# EAGLE board Carte_Mere_V3 (EAGLE 9.5.2)
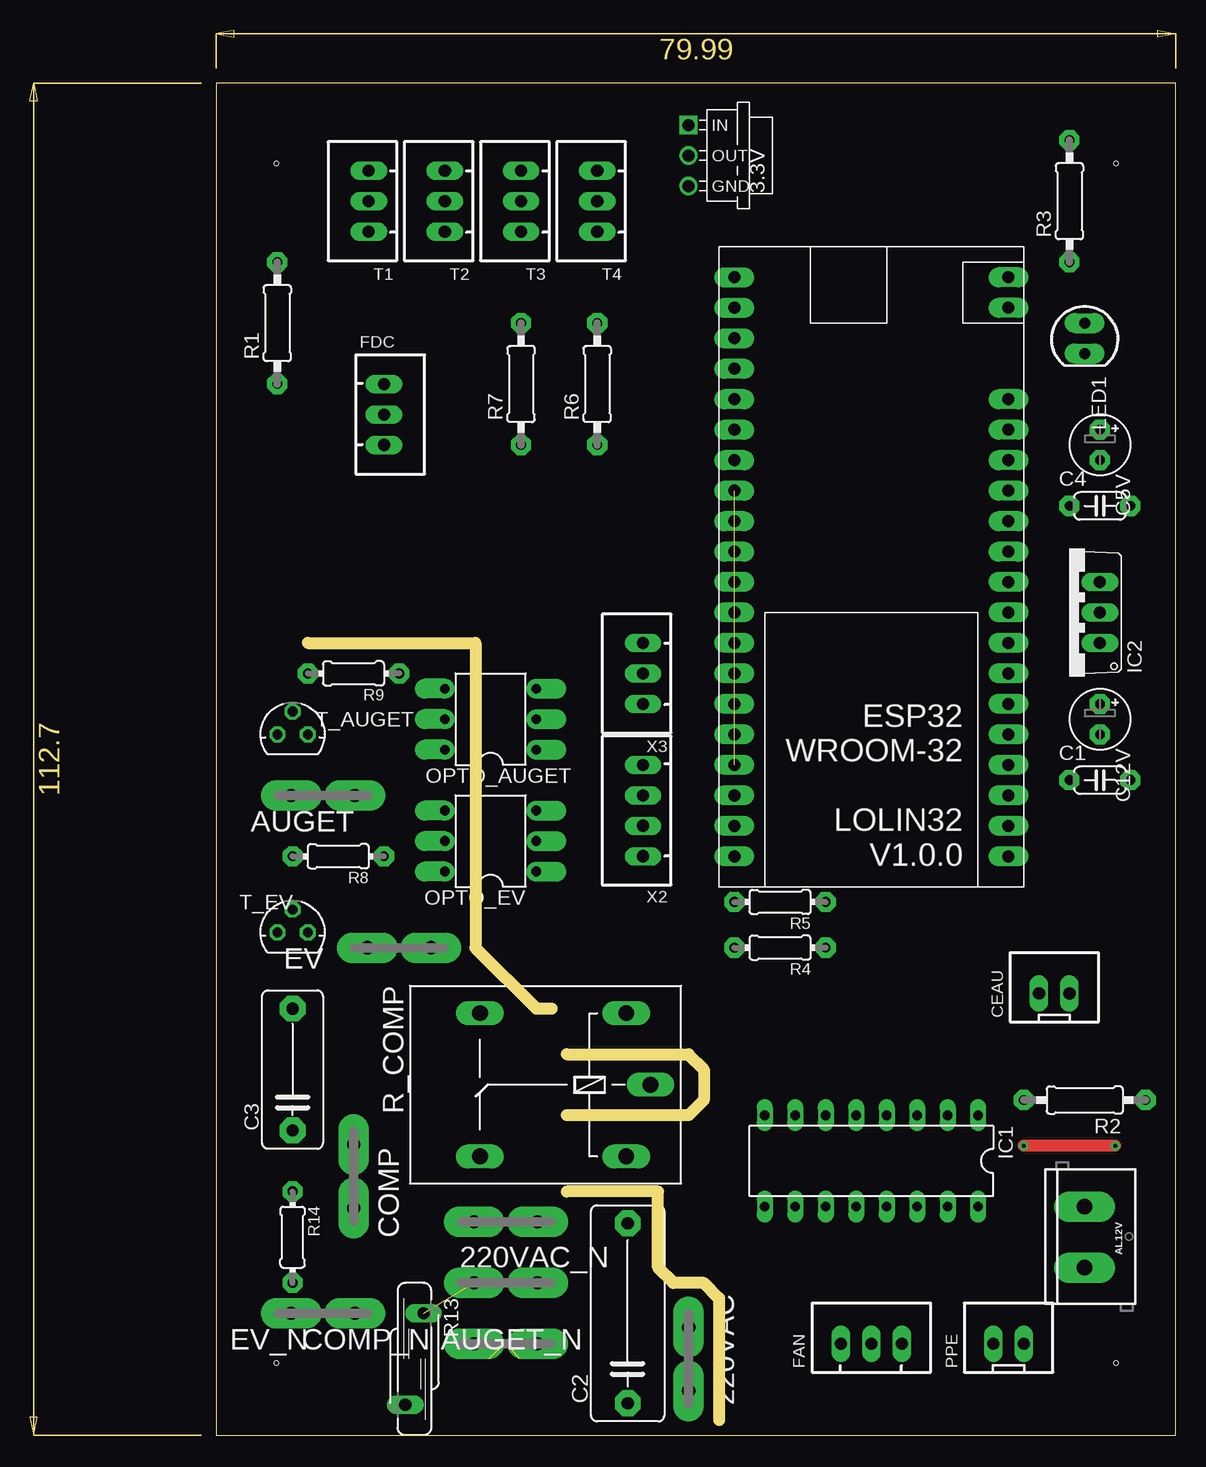
[diagram p0: board, top side]
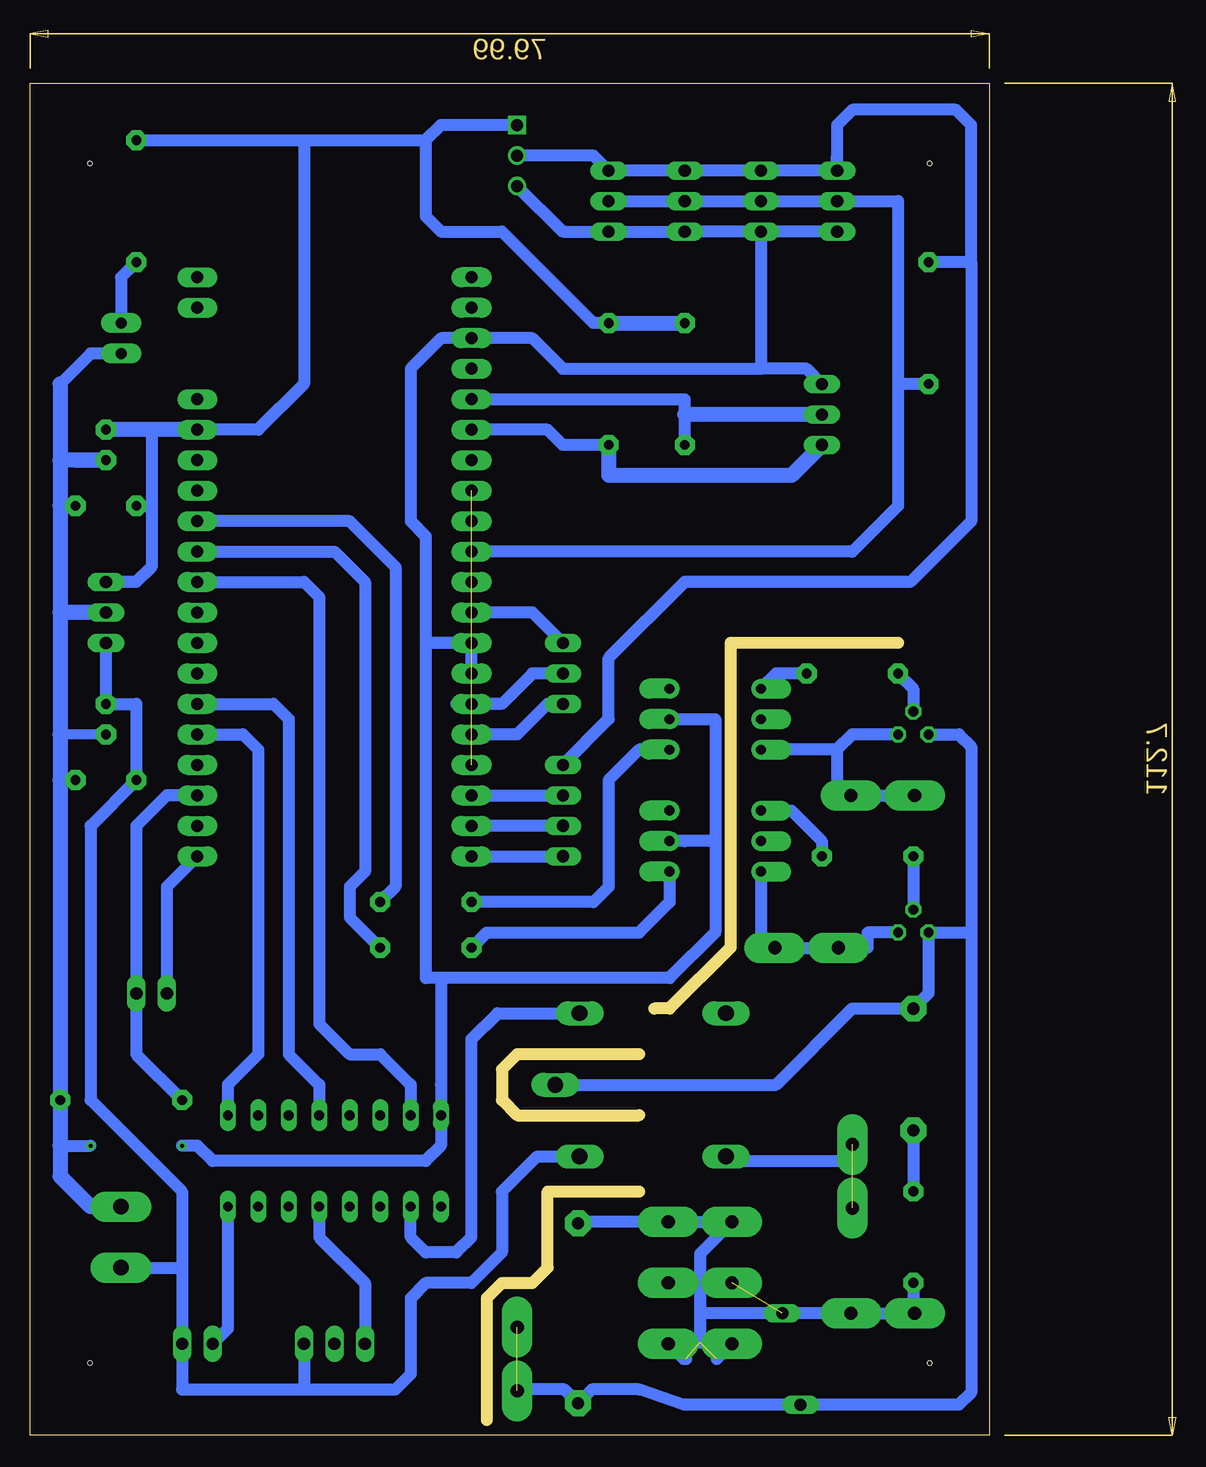
[diagram p1: board, bottom side, seen from below]

Size 79.99 x 112.7 mm. Coordinates in mm from the lower left corner, seen from the top.
Outline: 29.21,31.75 39.37,31.75 40.64,30.48 40.64,27.94 39.37,26.67 29.21,26.67
Outline: 41.91,1.27 41.91,11.43 40.64,12.7 38.1,12.7 36.83,13.97 36.83,20.32 29.21,20.32
Outline: 7.62,66.04 21.59,66.04 21.59,40.64 26.67,35.56 27.94,35.56
Outline: 0,0 79.99,0 79.99,112.7 0,112.7 0,0
Copper layers (1*16): Top 0.035mm / dielectric 1.5mm / Bottom 0.035mm
Design rules "default": minimum track width 6mil, minimum drill 0.35mm, track to track 6mil, track to pad 6mil, pad to pad 6mil, via to via 6mil, smd to smd 6mil, copper to edge 40mil, drill to drill 6mil, minimum pad ring 10mil, minimum via ring 8mil, stop-mask expansion 4mil, vias tented up to drill 0mil, thermal gap 10mil
Holes 0.35 mm at 5,6 75,6 5,106 75,106

## Footprints (pad centres in the part's own frame; a part is rotated, then mirrored left to right if it is on the bottom)
REG-AMS1117-3P#V = drill 1 square: 1 -2.54,-5.08 | drill 1: 2 0,-5.08; 3 2.54,-5.08
F061.040 = drill 1.1 pad 2.54 long: A1 -2.65,0; A2 2.65,0
BORNIER_A_VIS_2_5.12MM = drill 1.3 pad 2.54 long: 1 -2.54,0; 2 2.54,0
C050-024X044 = drill 0.813 pad 1.676 octagon: 1 -2.54,0; 2 2.54,0
C15B6 = drill 1.016 pad 2.159 octagon: 1 -7.493,0; 2 7.493,0
C10B5 = drill 1.016 pad 2.159 octagon: 1 -5.08,0; 2 5.08,0
E2,5-5 = drill 0.813 pad 1.676 octagon: V+ -1.27,0; V- 1.27,0
JST-XH-02-PACKAGE-LONG-PAD = drill 1.016 long: 1 -1.27,0; 2 1.27,0
JST-XH-03-PACKAGE-LONG-PAD = drill 1.016 long: 1 -2.54,0; 2 0,0; 3 2.54,0
DIL16 = drill 0.813 long: 1 -8.89,-3.81; 2 -6.35,-3.81; 3 -3.81,-3.81; 4 -1.27,-3.81; 5 1.27,-3.81; 6 3.81,-3.81; 7 6.35,-3.81; 8 8.89,-3.81; 9 8.89,3.81; 10 6.35,3.81; 11 3.81,3.81; 12 1.27,3.81; 13 -1.27,3.81; 14 -3.81,3.81; 15 -6.35,3.81; 16 -8.89,3.81
TO220V = drill 1.016 long: 1 -2.54,-2.54; 2 0,-2.54; 3 2.54,-2.54
LED5MM = drill 0.9 pad 1.676 long: A -1.27,0; K 1.27,0
DIL06 = drill 0.813 pad 1.676 offset: 1 -2.54,-3.81; 2 0,-3.81; 3 2.54,-3.81; 4 2.54,3.81; 5 0,3.81; 6 -2.54,3.81
0207/10 = drill 0.813 pad 1.676 octagon: 1 -5.08,0; 2 5.08,0
0204/7 = drill 0.813 pad 1.676 octagon: 1 -3.81,0; 2 3.81,0
S10K11 = drill 1.016 long: 1 -0.762,-3.81; 2 0.762,3.81
G5LE = drill 1.321 long: 1 -7.493,-5.969; 2 -7.493,5.969; O 4.699,5.969; P -9.525,0; S 4.699,-5.969
TO92-6 = drill 0.813 octagon: A1 -1.27,0; A2 1.27,0; G 0,1.905
ESP32_LOLIN_V1.0.0 = drill 1 pad 1.676 long: 1 -11.43,24.13; 2 -11.43,21.59; 3 -11.43,19.05; 4 -11.43,16.51; 5 -11.43,13.97; 6 -11.43,11.43; 7 -11.43,8.89; 8 -11.43,6.35; 9 -11.43,3.81; 10 -11.43,1.27; 11 -11.43,-1.27; 12 -11.43,-3.81; 13 -11.43,-6.35; 14 -11.43,-8.89; 15 -11.43,-11.43; 16 -11.43,-13.97; 17 11.43,24.13; 18 11.43,21.59; 19 11.43,19.05; 20 11.43,16.51; 21 11.43,13.97; 22 11.43,11.43; 23 11.43,8.89; 24 11.43,6.35; 25 11.43,3.81; 26 11.43,1.27; 27 11.43,-1.27; 28 11.43,-3.81; 29 11.43,-6.35; 30 11.43,-8.89; 31 11.43,-11.43; 32 11.43,-13.97; 33 11.43,-16.51; 34 11.43,-19.05; 35 11.43,-21.59; 36 11.43,-24.13; + -11.43,-21.59; - -11.43,-24.13
JST-XH-04-PACKAGE-LONG-PAD = drill 1.016 long: 1 -3.81,0; 2 -1.27,0; 3 1.27,0; 4 3.81,0

## Placement (x,y rotation side)
3.3V  REG-AMS1117-3P-3.3V#V  [REG-AMS1117-3P#V]  44.45,106.68 270 top
220VAC  PIN2F061.040  [F061.040]  39.37,6.35 90 top
220VAC_N  PIN2F061.040  [F061.040]  24.13,17.78 0 top
AL12V  [BORNIER_A_VIS_2_5.12MM]  72.39,16.51 270 top
AUGET  PIN2F061.040  [F061.040]  8.89,53.34 180 top
AUGET_N  PIN2F061.040  [F061.040]  24.13,12.7 180 top
C1  100nF  [C050-024X044]  73.66,54.61 0 top
C2  0.1µF  [C15B6]  34.29,10.16 90 top
C3  47nF  [C10B5]  6.35,30.48 90 top
C4  100nF  [C050-024X044]  73.66,77.47 0 top
C5V  47µF  [E2,5-5]  73.66,82.55 270 top
C12V  47µF  [E2,5-5]  73.66,59.69 270 top
CEAU  JST-XH-02-PIN-LONG-PAD  [JST-XH-02-PACKAGE-LONG-PAD]  69.85,36.83 0 top
COMP  PIN2F061.040  [F061.040]  11.43,21.59 90 top
COMP_N  PIN2F061.040  [F061.040]  24.13,7.62 180 top
EV  PIN2F061.040  [F061.040]  15.24,40.64 180 top
EV_N  PIN2F061.040  [F061.040]  8.89,10.16 180 top
FAN  JST-XH-03-PIN-LONG-PAD  [JST-XH-03-PACKAGE-LONG-PAD]  54.61,7.62 0 top
FDC  JST-XH-03-PIN-LONG-PAD  [JST-XH-03-PACKAGE-LONG-PAD]  13.97,85.09 270 top
IC1  ULN2003AN  [DIL16]  54.61,22.86 180 top
IC2  7805TV  [TO220V]  71.12,68.58 90 top
LED1  [LED5MM]  72.39,91.44 270 top
OPTO_AUGET  MOC3041M  [DIL06]  22.86,59.69 90 top
OPTO_EV  MOC3041M  [DIL06]  22.86,49.53 90 top
PPE  JST-XH-02-PIN-LONG-PAD  [JST-XH-02-PACKAGE-LONG-PAD]  66.04,7.62 0 top
R1  4.7K  [0207/10]  5.08,92.71 90 top
R2  10K  [0207/10]  72.39,27.94 180 top
R3  330R  [0207/10]  71.12,102.87 90 top
R4  330R  [0204/7]  46.99,40.64 180 top
R5  330R  [0204/7]  46.99,44.45 180 top
R6  4.7K  [0207/10]  31.75,87.63 90 top
R7  4.7K  [0207/10]  25.4,87.63 90 top
R8  220R  [0204/7]  10.16,48.26 180 top
R9  220R  [0204/7]  11.43,63.5 180 top
R13  S10K11  [S10K11]  16.51,6.35 180 top
R14  220R  [0204/7]  6.35,16.51 270 top
R_COMP  G5L  [G5LE]  26.67,29.21 180 top
T1  JST-XH-03-PIN-LONG-PAD  [JST-XH-03-PACKAGE-LONG-PAD]  12.7,102.87 90 top
T2  JST-XH-03-PIN-LONG-PAD  [JST-XH-03-PACKAGE-LONG-PAD]  19.05,102.87 90 top
T3  JST-XH-03-PIN-LONG-PAD  [JST-XH-03-PACKAGE-LONG-PAD]  25.4,102.87 90 top
T4  JST-XH-03-PIN-LONG-PAD  [JST-XH-03-PACKAGE-LONG-PAD]  31.75,102.87 90 top
T_AUGET  TRIAC_TO92-1  [TO92-6]  6.35,58.42 0 top
T_EV  TRIAC_TO92-1  [TO92-6]  6.35,41.91 0 top
U$1  ESP32_LOLIN_V1.0.0  [ESP32_LOLIN_V1.0.0]  54.61,72.39 180 top
X2  JST-XH-04-PIN-LONG-PAD  [JST-XH-04-PACKAGE-LONG-PAD]  35.56,52.07 90 top
X3  JST-XH-03-PIN-LONG-PAD  [JST-XH-03-PACKAGE-LONG-PAD]  35.56,63.5 90 top

## Library data of the parts
3.3V = 05-arduino_etc
220VAC 220VAC_N AUGET AUGET_N COMP COMP_N EV EV_N = con-faston; OC_FARNELL: unknown; OC_NEWARK: unknown
AL12V = _Remy; SF_SKU: PRT-08432
C1-C4 C5V C12V IC2 R4 R5 R8 R9 R14 = 00-LIVIO
CEAU FAN FDC PPE T1-T4 X2 X3 = con-JST XH Connectors v1-0
IC1 = uln-udn
LED1 R1-R3 R6 R7 U$1 = _Remy
OPTO_AUGET OPTO_EV = 04_Remy; MF: FAIRCHILD SEMICONDUCTOR; MPN: MOC3041M; OC_FARNELL: 1086677; OC_NEWARK: 78K6090
R13 = varistor
R_COMP = relay; OC_FARNELL: unknown; OC_NEWARK: unknown
T_AUGET T_EV = 04_Remy

## Nets
0V: 3.3V.3 AL12V.1 C1.2 C4.2 C5V.V- C12V.V- FDC.1 IC1.8 IC2.2 LED1.K OPTO_AUGET.2 OPTO_EV.2 R2.1 T1.1 T2.1 T3.1 T4.1 U$1.23 U$1.24 U$1.34
3.3V: CEAU.1 U$1.1
3V3: U$1.20 U$1.29
+5V: 3.3V.1 C4.1 C5V.V+ IC2.3 R3.2 R6.2 R7.2 U$1.15
+12V: AL12V.2 C1.1 C12V.V+ FAN.3 IC2.1 PPE.2 R_COMP.2
BAT+: U$1.+
BAT-: U$1.-
GND: U$1.16
N$1: U$1.21 X3.1
N$2: EV.A1 EV.A2 OPTO_EV.6 T_EV.A2
N$3: IC1.1 U$1.5
N$4: FDC.2 R7.1 U$1.32
N$5: IC1.4 U$1.6
N$6: IC1.10 R_COMP.1
N$7: LED1.A R3.1
N$8: IC1.16 PPE.1
N$9: FAN.1 IC1.13
N$11: IC1.7 U$1.10
N$12: R4.1 U$1.11
N$13: R5.1 U$1.12
N$15: OPTO_EV.1 R4.2
N$16: AUGET.A1 AUGET.A2 OPTO_AUGET.6 T_AUGET.A2
N$17: U$1.22 X3.2
N$18: OPTO_EV.4 R8.1
N$21: OPTO_AUGET.1 R5.2
N$22: U$1.17 X2.1
N$23: FDC.3 R6.1 U$1.31
N$24: U$1.18 X2.2
N$25: U$1.19 X2.3
N$27: U$1.25 X3.3
N$28: CEAU.2 R2.2 U$1.3
N$29: OPTO_AUGET.4 R9.1
N$30: R1.1 T1.2 T2.2 T3.2 T4.2 U$1.27
N$31: R8.2 T_EV.G
N$32: R9.2 T_AUGET.G
N$33: 220VAC.A1 220VAC.A2 C2.1 C3.2 R13.2 R_COMP.P T_AUGET.A1 T_EV.A1
N$38: COMP.A1 COMP.A2 R_COMP.O
N$39: 220VAC_N.A1 220VAC_N.A2 AUGET_N.A1 AUGET_N.A2 C2.2 COMP_N.A1 COMP_N.A2 EV_N.A1 EV_N.A2 R13.1 R14.2
N$41: C3.1 R14.1
VCC: 3.3V.2 R1.2 T1.3 T2.3 T3.3 T4.3 X2.4

## Tracks (layer width: path | path; a pad name or v marks a point on that pad's centre or on a via)
0V  (via drill 0.35)
  Top 1.016: v74.93,24.13 v67.31,24.13
  Bottom 0.813: C12V.V- 77.47,58.42
  Bottom 1.016: 19.05,88.9 35.56,88.9 38.1,91.44 U$1.34 45.72,91.44 48.26,88.9 48.26,76.2 46.99,74.93 46.99,66.04 | T2.1 19.05,88.9 | FDC.1 15.24,88.9 19.05,88.9 | 46.99,66.04 U$1.24 U$1.23 | T2.1 T3.1 T4.1 | T4.1 35.56,100.33 3.3V.3 | T4.1 30.48,100.33 | T1.1 T2.1 | 25.4,49.53 OPTO_EV.2 22.86,49.53 | 22.86,49.53 22.86,59.69 OPTO_AUGET.2 | LED1.K 74.93,90.17 77.47,87.63 | 45.72,29.21 IC1.8 | 46.99,66.04 46.99,38.1 45.72,38.1 | 77.47,24.13 v74.93,24.13 | v67.31,24.13 66.04,24.13 64.77,22.86 46.99,22.86 45.72,24.13 IC1.8 | 22.86,49.53 22.86,41.91 26.67,38.1 45.72,38.1 | 45.72,38.1 IC1.8 | C4.2 77.47,77.47 | C1.2 77.47,54.61
  Bottom 1.27: 76.2,81.28 C5V.V- 77.47,81.28 | 76.2,68.58 IC2.2 77.47,68.58 | 77.47,87.63 77.47,81.28 | 77.47,81.28 77.47,77.47 77.47,68.58 | 77.47,68.58 77.47,58.42 77.47,54.61 R2.1 77.47,24.13 77.47,21.59 74.93,19.05 AL12V.1
3.3V
  Bottom 1.016: U$1.1 68.58,45.72 CEAU.1
3V3  (1 unrouted)
+5V
  Bottom 1.016: R6.2 33.02,92.71 40.64,100.33 45.72,100.33 46.99,101.6 46.99,107.95 | C5V.V+ 69.85,83.82 69.85,77.47 | 69.85,77.47 69.85,72.39 71.12,71.12 IC2.3 | 3.3V.1 45.72,109.22 46.99,107.95 | R3.2 57.15,107.95 | 57.15,107.95 46.99,107.95 | 57.15,107.95 57.15,87.63 60.96,83.82 67.31,83.82 | C4.1 69.85,77.47
  Bottom 1.27: U$1.15 67.31,83.82 C5V.V+ | R6.2 R7.2
+12V
  Bottom 1.016: FAN.3 57.15,3.81 | 57.15,3.81 67.31,3.81 PPE.2 67.31,13.97 | AL12V.2 67.31,13.97 | IC2.1 C12V.V+ 71.12,60.96 C1.1 74.93,50.8 74.93,27.94 67.31,20.32 67.31,13.97 | 57.15,3.81 49.53,3.81 48.26,5.08 48.26,11.43 46.99,12.7 43.18,12.7 40.64,15.24 40.64,20.32 37.72,23.24 R_COMP.2
N$1
  Bottom 1.016: X3.1 36.83,60.96 39.37,58.42 U$1.21
N$2
  Bottom 1.016: T_EV.A2 10.16,41.91 10.16,40.64 EV.A2 EV.A1 19.05,40.64 OPTO_EV.6
N$3
  Bottom 1.016: U$1.5 62.23,58.42 60.96,57.15 60.96,31.75 63.5,29.21 IC1.1
N$4
  Bottom 1.016: R7.1 25.4,85.09 25.4,86.36 U$1.32
  Bottom 1.27: FDC.2 25.4,85.09
N$5
  Bottom 1.016: U$1.6 59.69,60.96 58.42,59.69 58.42,31.75 55.88,29.21 IC1.4
N$6
  Bottom 1.016: R_COMP.1 41.02,35.18 43.18,33.02 43.18,16.51 44.45,15.24 46.99,15.24 48.26,16.51 IC1.10
N$7
  Bottom 1.016: R3.1 72.39,96.52 LED1.A
N$8
  Bottom 1.016: IC1.16 63.5,8.89 PPE.1
N$9
  Bottom 1.016: FAN.1 52.07,12.7 55.88,16.51 IC1.13
N$11
  Bottom 1.016: U$1.10 57.15,71.12 55.88,69.85 55.88,34.29 53.34,31.75 50.8,31.75 48.26,29.21 IC1.7
N$12
  Bottom 1.016: U$1.11 54.61,73.66 52.07,71.12 52.07,46.99 53.34,45.72 53.34,43.18 R4.1
N$13
  Bottom 1.016: R5.1 49.53,45.72 49.53,72.39 53.34,76.2 U$1.12
N$15
  Bottom 1.016: R4.2 41.91,41.91 29.21,41.91 26.67,44.45 OPTO_EV.1
N$16
  Bottom 1.016: T_AUGET.A2 11.43,58.42 12.7,57.15 | 12.7,57.15 OPTO_AUGET.6 | 12.7,57.15 12.7,54.5 AUGET.A1 AUGET.A2
N$17
  Bottom 1.016: X3.2 38.1,63.5 40.64,60.96 U$1.22 44.45,60.96
N$18
  Bottom 1.016: OPTO_EV.4 16.51,52.07 13.97,49.53 R8.1
N$21
  Bottom 1.016: R5.2 33.02,44.45 31.75,45.72 31.75,54.61 29.21,57.15 OPTO_AUGET.1
N$22
  Bottom 1.016: U$1.17 X2.1
N$23
  Bottom 1.016: R6.1 35.56,82.55 36.83,83.82 U$1.31
  Bottom 1.27: R6.1 31.75,80.01 16.51,80.01 FDC.3
N$24
  Bottom 1.016: X2.2 U$1.18
N$25
  Bottom 1.016: U$1.19 X2.3
N$27
  Bottom 1.016: X3.3 38.1,68.58 U$1.25
N$28
  Bottom 1.016: U$1.3 68.58,53.34 71.12,50.8 CEAU.2 | CEAU.2 71.12,38.1 | CEAU.2 71.12,31.75 R2.2
N$29
  Bottom 1.016: R9.1 17.78,63.5 OPTO_AUGET.4
N$30
  Bottom 1.016: 7.62,87.63 7.62,102.87 T1.2 T2.2 T3.2 T4.2 | 7.62,87.63 7.62,77.47 11.43,73.66 U$1.27 | R1.1 7.62,87.63
N$31
  Bottom 1.016: R8.2 T_EV.G
N$32
  Bottom 1.016: R9.2 6.35,62.23 T_AUGET.G
N$33  (1 unrouted)
  Bottom 1.016: 220VAC.A1 39.26,3.81 35.43,3.81 C2.1 33.15,3.81 29.21,3.81 25.51,2.54 R13.2 2.54,2.54 1.52,3.56 1.52,41.91 | T_AUGET.A1 2.54,58.42 1.52,57.4 1.52,41.91 | R_COMP.P 17.78,29.21 11.43,35.56 C3.2 5.08,36.83 T_EV.A1 1.52,41.91
N$38  (2 unrouted)
  Bottom 1.016: R_COMP.O 21.59,22.86 11.43,22.86
N$39  (3 unrouted)
  Bottom 1.016: C2.2 34.16,17.78 220VAC_N.A2 220VAC_N.A1 24.13,15.13 24.13,12.7 | 24.13,10.16 R13.1 EV_N.A1 EV_N.A2 6.35,10.27 R14.2 | 24.13,10.16 24.13,7.73 | 24.13,12.7 24.13,10.16 | AUGET_N.A1 24.13,12.7 | COMP_N.A1 25.51,6.35 25.29,6.35 | 22.75,6.35 COMP_N.A2
N$41
  Bottom 1.016: C3.1 R14.1
VCC
  Bottom 1.016: 1.52,97.79 1.52,76.2 6.6,71.12 25.4,71.12 31.75,64.77 31.75,59.69 X2.4 | 1.52,97.79 1.52,109.22 2.79,110.49 11.43,110.49 12.7,109.22 T1.3 | 1.52,97.79 R1.2 | T1.3 T2.3 T3.3 T4.3 33.02,106.68 3.3V.2 | T1.3 12.7,106.68